# Altium PCB PCB-watch-V2.4.PcbDoc
Units mil, origin at the board's own origin, x right, y up, seen from the top; angles counter-clockwise.
Board outline 1043.31 x 1259.84 mil, 4 copper layers (Top Layer, GND, POWER, Bottom Layer), stack 23.756 mil thick; 96 components, 97 nets, 405 pads, 178 vias.
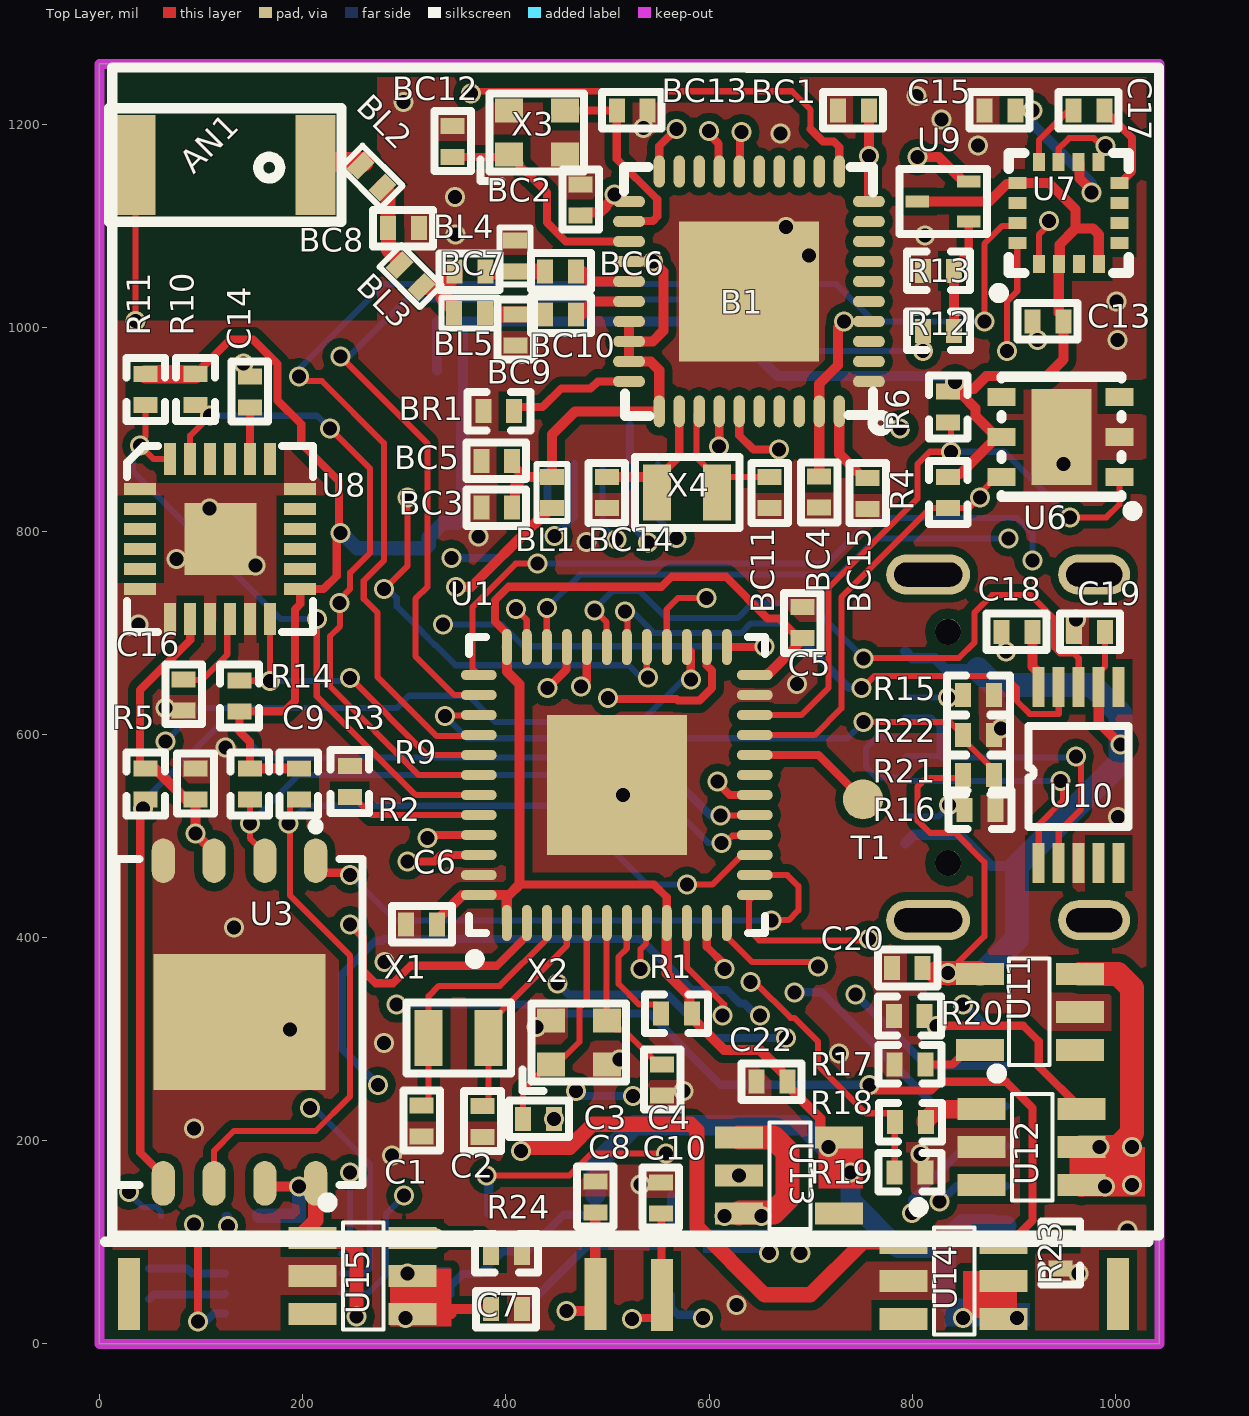
[diagram p0: Top Layer view]
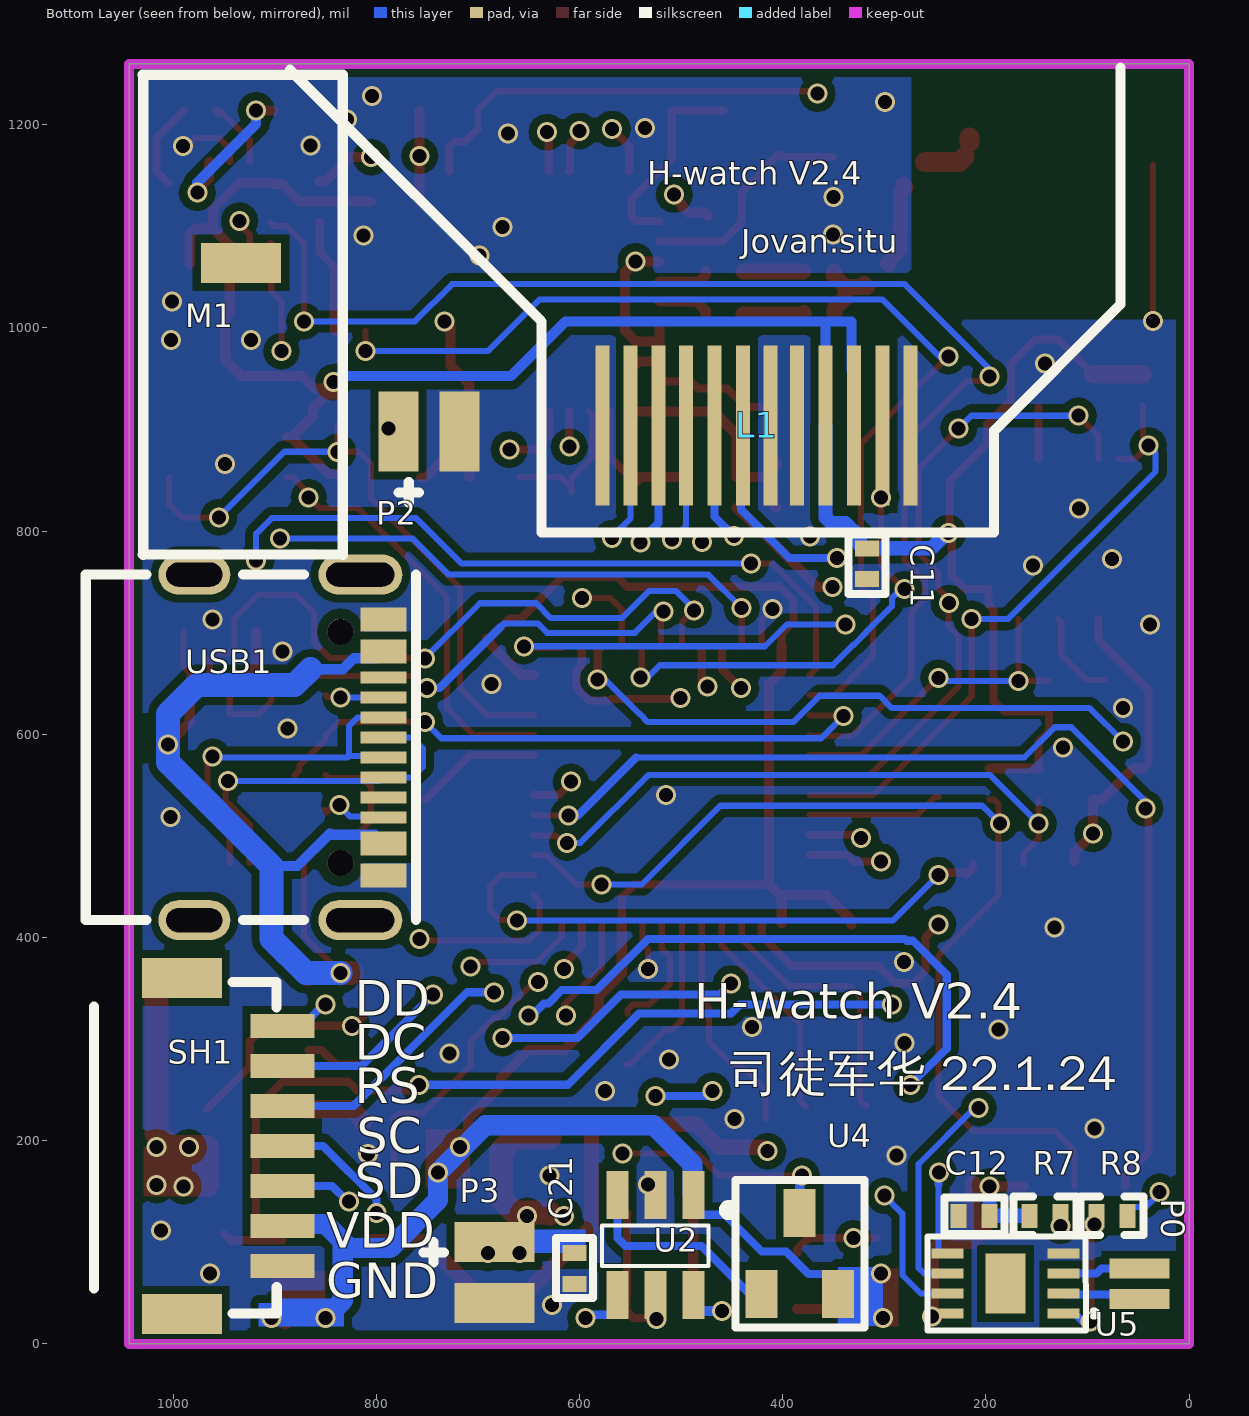
[diagram p1: Bottom Layer view, seen from below]
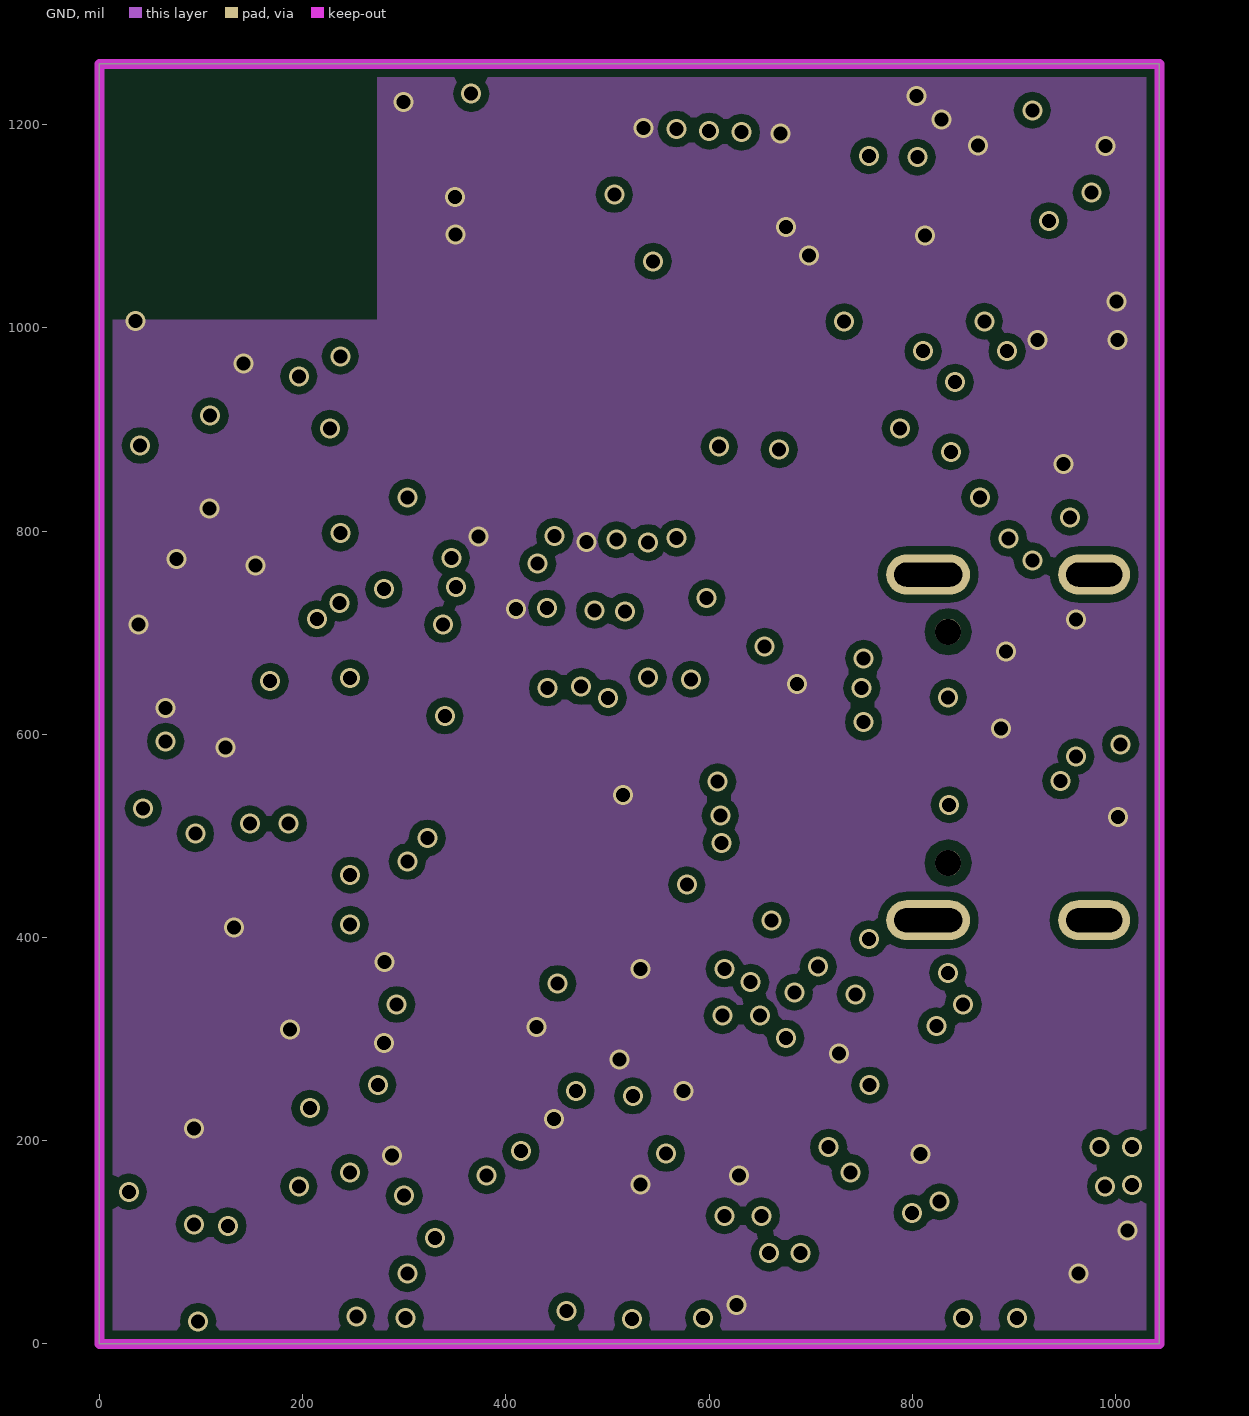
[diagram p2: GND]
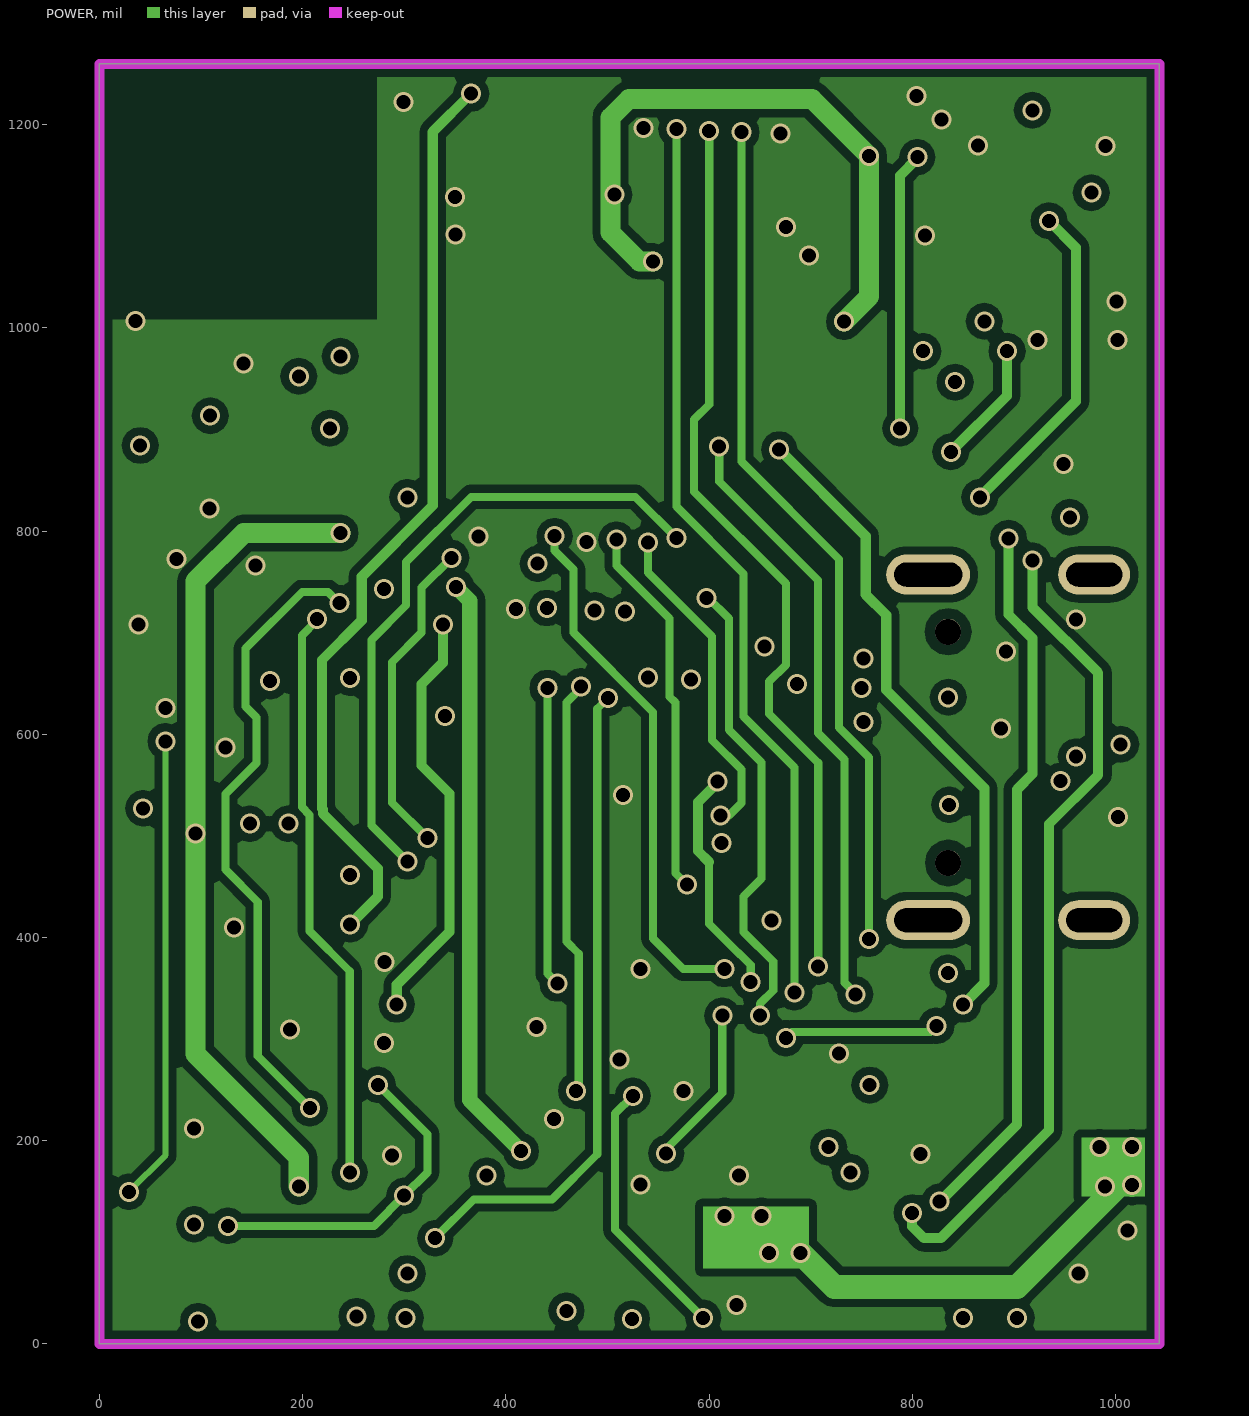
[diagram p3: POWER]
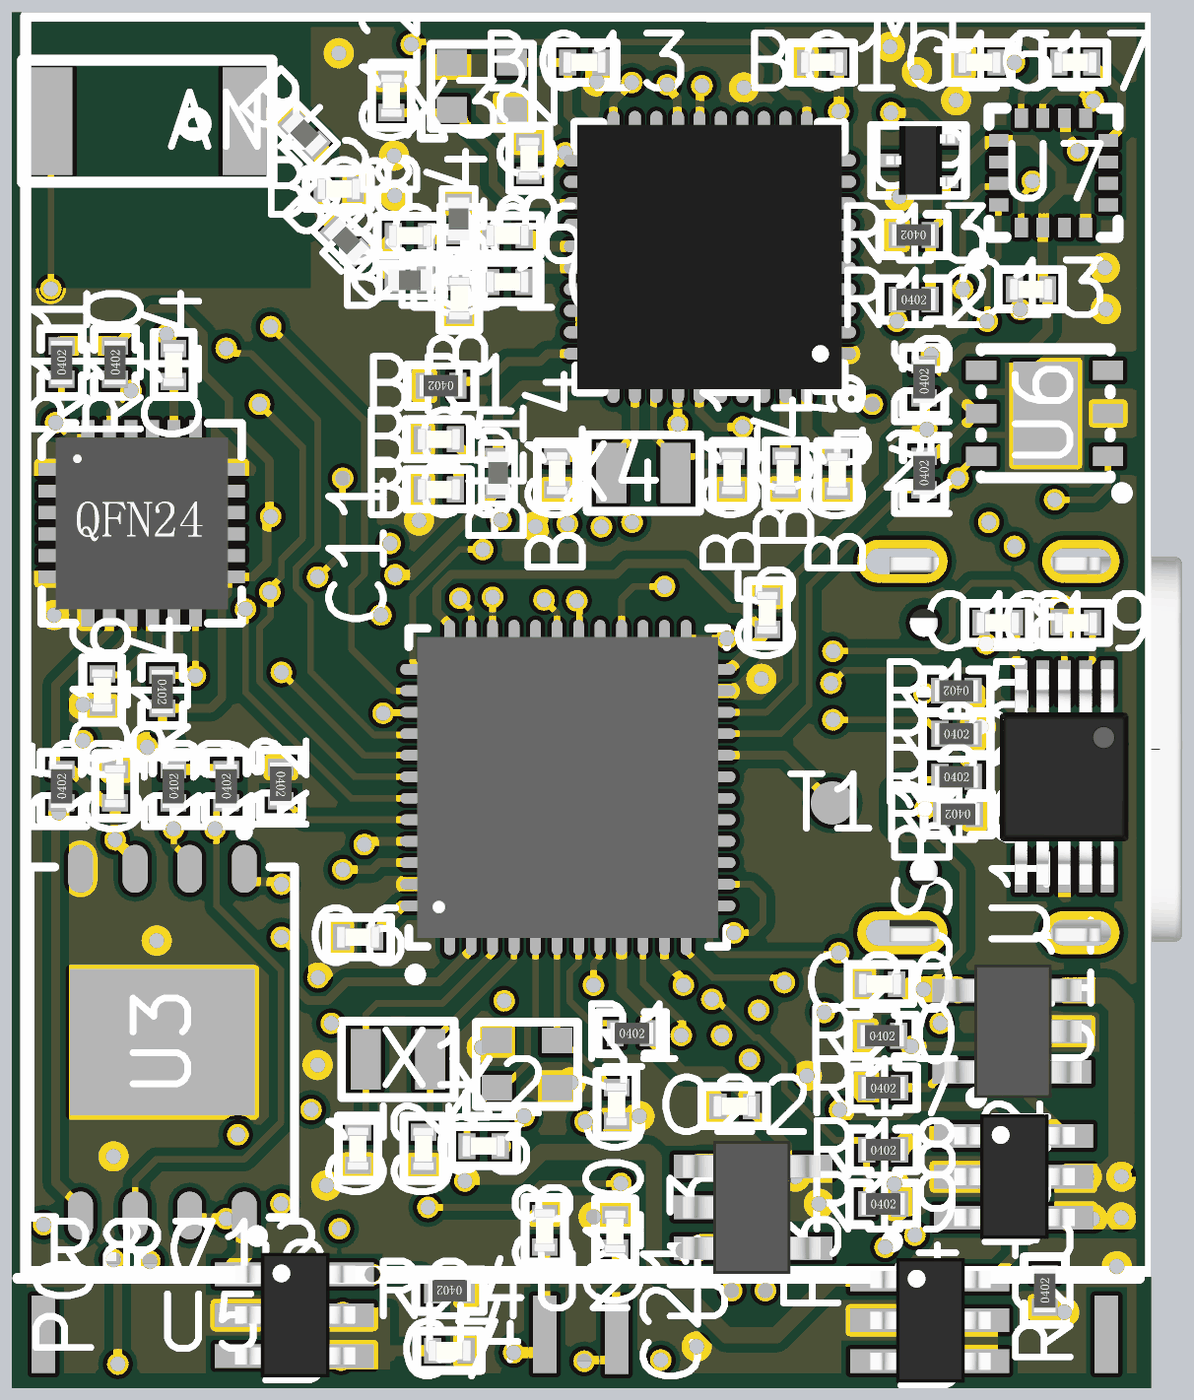
[diagram p4: 3D render of the assembled board from above, using the file's embedded part models]
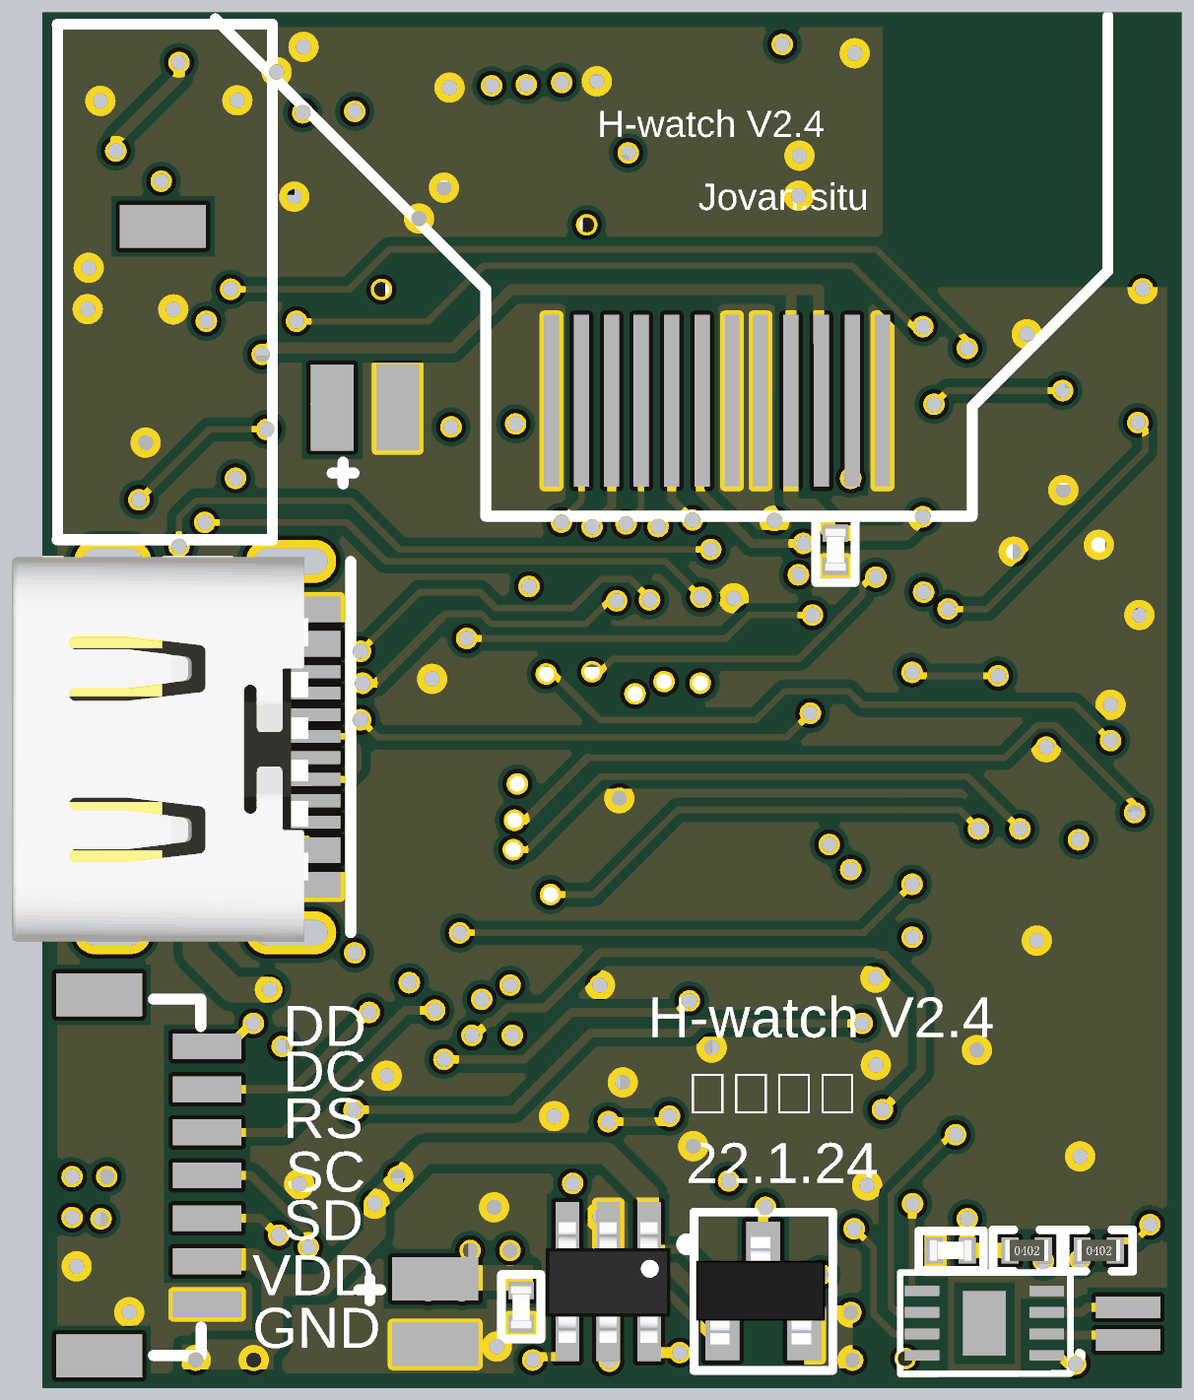
[diagram p5: 3D render of the assembled board from below, using the file's embedded part models]

## Layer stack, top to bottom
Top Solder: solder mask 0.4, Solder Resist, Dk 3.5
Top Layer: signal copper 1.4
Dielectric 2: prepreg 2.8, PP-006, Dk 4.1
GND: signal copper 1.378
Dielectric 1: dielectric 12.6, FR-4, Dk 4.8
POWER: signal copper 1.378
Dielectric 3: prepreg 2.8, PP-006, Dk 4.1
Bottom Layer: signal copper 1.4
Bottom Solder: solder mask 0.4, Solder Resist, Dk 3.5

## Board outline
0,0 0,1259.84 1043.31,1259.84 1043.31,0

## Design rules (kind name [scope] priority, off if disabled: settings)
Clearance [All] p1: gap=8 except(4: Arc-Arc Arc-Track Arc-SMDPad Arc-THPad Arc-Via Track-Track Track-SMDPad Track-THPad Track-Via SMDPad-SMDPad SMDPad-THPad SMDPad-Via THPad-THPad THPad-Via Via-Via; 10: Arc-Text Track-Text SMDPad-Text THPad-Text Via-Text Fill-Text Poly-Text Region-Text Text-Text)
DiffPairsRouting [All] p1: maxlimit=10 minlimit=5.91 mostfreqgap=10 toplayer_minwidth=15 toplayer_maxwidth=15 toplayer_prefwidth=15 midlayer1_minwidth=15 midlayer1_maxwidth=15 midlayer1_prefwidth=15 midlayer2_minwidth=15 midlayer2_maxwidth=15 midlayer2_prefwidth=15 bottomlayer_minwidth=15 bottomlayer_maxwidth=15 bottomlayer_prefwidth=15 maxuncoupledlength=500
HoleToHoleClearance [All] p1: gap=5.91 allowstackedmicrovias=TRUE
MinimumSolderMaskSliver [All] p1: minsoldermaskwidth=0.39
PlaneConnect [All] p1: planeconnectstyle=Relief reliefexpansion=20 reliefentries=4 reliefconductorwidth=19.68 reliefairgap=10
PolygonConnect [All] p1: connectstyle=Direct reliefconductorwidth=15.75 reliefentries=4 polygonreliefangle="90 Angle" airgapwidth=5.91
RoutingVias [All] p1: holewidth=118.11 width=118.11 viastyle="Through Hole" minholewidth=9.84 minwidth=13.78 maxholewidth=118.11 maxwidth=118.11
SilkToSilkClearance [All] p1: silktosilkclearance=0
SilkToSolderMaskClearance [IsPad] p1: minsilkscreentomaskgap=0 clearancetoexposedcopper=TRUE
SolderMaskExpansion [All] p1: expansion=4
Width [All] p1: maxlimit=39.37 minlimit=3 preferedwidth=6
24 further rules are at their usual default settings.

## Classes and differential pairs
component class 01-MCU-V2.4: C1 C2 C3 C4 C5 C6 R1 R2 SH1 T1 U1 X1 X2
component class 02-bluetooth-V2.4: AN1 B1 BC1 BC2 BC3 BC4 BC5 BC6 BC7 BC8 BC9 BC10 BC11 BC12 BC13 BC14 BC15 BL1 BL2 BL3 BL4 BL5 BR1 X3 X4
component class 03-PeripheralPart-V2.4: 1 C7 C8 C9 C10 C11 C12 C13 C14 C15 C16 C17 L1 M1 P0 P2 R3 R4 R5 R6 R7 R8 R9 R10 R11 R12 R13 R14 U2 U3 U4 U5 U6 U7 U8 U9
component class 04-POWERV2.4: C18 C19 C20 C21 C22 P3 R15 R16 R17 R18 R19 R20 R21 R22 R23 R24 U10 U11 U12 U13 U14 USB1

## Components (designator, comment, footprint, x,y, rotation, side; value= is the part's Value field where it differs from the comment)
AN1 "AN9520-245" AN-5120 212.79,1160.24 r180 top
B1 "CC2541" QFN40-CC254X 639.28,1035.84 r90 top
BC1 "100nF" CC1005-0402 742.09,1214 r180 top
BC2 "100nF" CC1005-0402 473.67,1125.87 r90 top
BC3 "220nF" CC1005-0402 391,823 r180 top
BC4 "100nF" CC1005-0402 708.43,838.24 r270 top
BC5 "10uF" CC1005-0402 391,869 r180 top
BC6 "18pF" CC1005-0402 453.87,1055.63 r0 top
BC7 "1pF" CC1005-0402 364.68,1055.2 r180 top
BC8 "1pF" CC1005-0402 299.34,1098.11 r180 top
BC9 "1pF" CC1005-0402 409.69,997.84 r90 top
BC10 "18pF" CC1005-0402 453.76,1013 r0 top
BC11 "15pF" CC1005-0402 659.56,838 r270 top
BC12 "27pF" CC1005-0402 347.56,1183.57 r90 top
BC13 "27pF" CC1005-0402 524.39,1214 r180 top
BC14 "15pF" CC1005-0402 499.32,837.83 r270 top
BC15 "100pF" CC1005-0402 756,836.96 r90 top
BL1 "2nH" Inductor-0402 445.24,838 r270 top
BL2 "1nH" Inductor-0402 267.87,1148.81 r315 top
BL3 "1nH" Inductor-0402 306.15,1050.96 r315 top
BL4 "2nH" Inductor-0402 409.11,1070.64 r270 top
BL5 "2nH" Inductor-0402 364.41,1014.72 r0 top
BR1 "56KR" CR1005-0402 393,918 r180 top
C1 "15pF" CC1005-0402 317,219.24 r90 top
C2 "15pF" CC1005-0402 377,219 r90 top
C3 "27pF" CC1005-0402 432,221.52 r0 top
C4 "27pF" CC1005-0402 553.81,259.88 r90 top
C5 "100nF" CC1005-0402 691.89,710.02 r270 top
C6 "100nF" CC1005-0402 317.01,412.91 r0 top
C7 "100NF" CC1005-0402 400.81,34.2 r180 top
C8 "1pF" CC1005-0402 488,144.46 r90 top
C9 "100nF" CC1005-0402 94.47,551.13 r90 top
C10 "1pF" CC1005-0402 552.54,143.34 r90 top
C11 "100nF" CC1005-0402 317.01,767.81 r270 bottom
C12 "100nF" CC1005-0402 211.51,126 r180 bottom
C13 "100nF" CC1005-0402 933.45,1006.31 r180 top
C14 "2.2uF" CC1005-0402 148,937 r90 top
C15 "4.7uF" CC1005-0402 886.2,1214 r180 top
C16 "100NF" CC1005-0402 82.79,638.83 r90 top
C17 "0.22uF" CC1005-0402 974,1214 r180 top
C18 "100nF" CC1005-0402 902.98,700.86 r180 top
C19 "100nF" CC1005-0402 974.51,700.86 r0 top
C20 "10uF" CC1005-0402 795.03,369.91 r0 top
C21 "10uF" CC1005-0402 604.89,74 r90 bottom
C22 "10uF" CC1005-0402 662,258 r180 top
L1 "TFT LED" LCD-1.3-(2) 274,904.07 r180 top locked
M1 "motor" motor 833,1249 r0 bottom
P0 "power" POWER2 49,74 r270 bottom
P2 "power" POWER-3.7V 793,848 r180 bottom
P3 "power" POWER-3.7V 733.57,115 r270 bottom
R1 "10K" CR1005-0402 567.78,325 r0 top
R2 "10K" CR1005-0402 246.34,553.31 r270 top
R3 "47K" CR1005-0402 148,551.13 r90 top
R4 "10K" CR1005-0402 835.3,838 r90 top
R5 "47K" CR1005-0402 45.39,551.13 r90 top
R6 "10K" CR1005-0402 835.3,922 r90 top
R7 "4.7K" CR1005-0402 141.72,126 r180 bottom
R8 "1K" CR1005-0402 75.78,126 r180 bottom
R9 "47K" CR1005-0402 196.27,551.13 r90 top
R10 "10K" CR1005-0402 94.47,939.22 r90 top
R11 "10K" CR1005-0402 45.39,939.22 r90 top
R12 "1K" CR1005-0402 826,997 r0 top
R13 "10K" CR1005-0402 825.86,1056 r180 top
R14 "10K" CR1005-0402 137.79,637.83 r270 top
R15 "1.5K" CR1005-0402 865,638.58 r180 top
R16 "1.5K" CR1005-0402 866.53,525.6 r180 top
R17 "2KR" CR1005-0402 797.97,275 r0 top
R18 "10K" CR1005-0402 798.03,218.13 r0 top
R19 "10K" CR1005-0402 797.97,168.73 r0 top
R20 "10K" CR1005-0402 797.03,322.72 r0 top
R21 "10K" CR1005-0402 865.14,559.84 r0 top
R22 "10K" CR1005-0402 865.14,599.21 r0 top
R23 "10K" CR1005-0402 946,89.24 r90 top
R24 "10K" CR1005-0402 400.81,89.24 r180 top
SH1 "SH1.0-7P" SH1.0-7P 925.65,234.18 r270 bottom
T1 "测试点" 测试点 751.44,535.86 r0 top
U1 "STM32L431CCU6" STM32-UFQFPN48_N 509.16,550 r90 top locked
U2 "BS812A-1" SOT23-6 522.81,96.65 r0 bottom
U3 "W25Q64JVEIQ" WSON-8_L8.0-W6.10-P1.27-TL-EP 137.79,316.73 r270 top
U4 "SI2305" SOT-23 420.57,49.15 r180 bottom
U5 "ST25DV04k" UFDFPN8 180.59,59.4 r0 bottom
U6 "SI7020" DFN-6 945.84,892.64 r90 top
U7 "HMC5883L" LPCC-16_L3.0-W3.0-P0.50-BL 954,1113 r0 top
U8 "MPU6050" "QFN24 - duplicate" 118.82,792.01 r0 top
U9 "MMBT3904TT1G" SOT-416 830.3,1124.43 r0 top
U10 "CH340E" MSOP-10 924.47,473.3 r90 top
U11 "TP4054" SOT23-5 964.95,364.33 r270 top
U12 "TPS22860" SOT23-6 918.22,196 r270 top
U13 "TPS709" SOT23-5 629.69,127.91 r90 top
U14 "TPS22860" SOT23-6 841.23,64.39 r270 top
U15 "TPS22860" SOT23-6 259.44,69.2 r270 top
USB1 "Tpye-c 16P" "TYPE-C 16P" 835.3,473.3 r270 bottom locked
X1 "32.768Khz" XTAL-2012 383.06,301 r180 top
X2 "32Mhz" XTAL-2016 444.2,275 r0 top
X3 "32Mhz" XTAL-2016 402.88,1170.69 r0 top
X4 "32.768Khz" XTAL-2012 548.94,838 r0 top

## Footprints (in the part's own frame and the unit in brackets; to place one, negate y for a bottom-side part, rotate by r counter-clockwise, add the part's x,y. Pads: shape width x height; smd on the part's side, far side on the other; paste and mask are expansions set on the pad)
AN-5120 [mm]
  rect 1x2.5 smd: 1(0,0) 2(4.5,0)
  silkscreen extent -0.65,-1.42 5.16,1.42, body extent -0.32,-1.03 4.77,1.03, height 1.2
CC1005-0402 [mm]
  rect 0.4x0.6 smd: 1(-0.387,0) 2(0.387,0)
  silkscreen extent -0.74,-0.46 0.76,0.46, body extent -0.5,-0.25 0.5,0.25, height 0.3
CR1005-0402 [mm]
  rect 0.4x0.6 smd: 1(-0.387,0) 2(0.387,0)
  silkscreen extent -0.79,-0.48 0.79,0.48, body extent -0.5,-0.25 0.5,0.25, height 0.35
DFN-6 [mm]
  rect 0.45x0.701 smd: 1(-1.001,-1.476) 2(0,-1.476) 3(1.001,-1.476) 4(1.001,1.476) 5(0,1.476) 6(-1.001,1.476)
  rect 2.4x1.5 smd: 7(0,-0.025)
  silkscreen extent -1.95,-1.9 1.5,1.47, body extent -1.52,-1.55 1.5,1.47, height 1
Inductor-0402 [mm]
  rect 0.4x0.6 smd: 1(-0.387,0) 2(0.387,0)
  silkscreen extent -0.71,-0.39 0.71,0.39, body extent -0.5,-0.25 0.5,0.25, height 0.25
LCD-1.3-(2) [mm]
  rect 0.35x4 smd far side: 1(0,0) 2(-0.7,0) 3(-1.419,0) 4(-2.128,0) 5(-2.838,0) 6(-3.5,0) 7(-4.193,0) 8(-4.902,0) 9(-5.612,0) 10(-6.3,0) 11(-7,0) 12(-7.7,0)
  silkscreen extent -19.53,-8.94 6.64,20.25, body extent -19.52,-8.94 6.67,20.21, height 2.32
LPCC-16_L3.0-W3.0-P0.50-BL [mm]
  rect 0.3x0.45 smd: 1(-0.749,-1.275) 2(-0.249,-1.275) 3(0.251,-1.275) 4(0.751,-1.275) 9(0.75,1.275) 10(0.25,1.275) 11(-0.25,1.275) 12(-0.749,1.275)
  rect 0.45x0.3 smd: 5(1.275,-0.748) 6(1.275,-0.248) 7(1.275,0.252) 8(1.275,0.752) 13(-1.275,0.752) 14(-1.275,0.252) 15(-1.275,-0.248) 16(-1.275,-0.748)
  silkscreen extent -1.87,-2.12 1.5,1.5, body extent -1.42,-1.48 1.42,1.42, height 0.9
motor [mm]
  rect 2x1 smd: 3(2.54,4.699)
  silkscreen extent 0,0 5,12, body extent 0,0.03 4.95,11.96, height 4.9
MSOP-10 [mm]
  rect 1x0.3 smd: 1(0,0) 2(0,-0.5) 3(0,-1) 4(0,-1.5) 5(0,-2) 6(4.403,-2) 7(4.403,-1.5) 8(4.403,-1) 9(4.403,-0.5) 10(4.403,0)
  silkscreen extent 0.9,-2.25 3.42,0.25, body extent -0.32,-2.5 4.71,0.5, height 1.05
POWER2 [mm]
  rect 0.5x1.5 smd: 1(0,0) 2(0.762,0)
POWER-3.7V [mm]
  rect 1x2 smd: 1(0.381,1.27) 2(1.905,1.27)
  silkscreen extent 0.38,-0.51 0.89,0
"QFN24 - duplicate" [mm]
  rect 0.8x0.3 smd: 1(-2,1.25) 2(-2,0.75) 3(-2,0.25) 4(-2,-0.25) 5(-2,-0.75) 6(-2,-1.25) 13(2,-1.25) 14(2,-0.75) 15(2,-0.25) 16(2,0.25) 17(2,0.75) 18(2,1.25)
  rect 1.8x1.8 smd: 1(0.005,0)
  rect 0.3x0.8 smd: 7(-1.25,-2) 8(-0.75,-2) 9(-0.25,-2) 10(0.25,-2) 11(0.75,-2) 12(1.25,-2) 19(1.25,2) 20(0.75,2) 21(0.25,2) 22(-0.25,2) 23(-0.75,2) 24(-1.25,2)
  silkscreen extent -2.32,-2.32 2.32,2.32, body extent -2,-2 2.01,2, height 0.9
QFN40-CC254X [mm]
  oval 0.28x0.8 smd: 1(-2.25,-2.998) 2(-1.75,-2.998) 3(-1.25,-2.998) 4(-0.75,-2.998) 5(-0.25,-2.998) 6(0.25,-2.998) 7(0.75,-2.998) 8(1.25,-2.998) 9(1.75,-2.998) 10(2.25,-2.998) 21(2.246,2.996) 22(1.75,2.998) 23(1.25,2.998) 24(0.75,2.998) 25(0.25,2.998) 26(-0.25,2.998) 27(-0.75,2.998) 28(-1.25,2.998) 29(-1.75,2.998) 30(-2.25,2.998)
  oval 0.8x0.28 smd: 11(2.998,-2.256) 12(2.998,-1.756) 13(2.998,-1.256) 14(2.998,-0.756) 15(2.998,-0.256) 16(2.998,0.244) 17(2.998,0.744) 18(2.998,1.244) 19(2.998,1.744) 20(2.998,2.244) 31(-2.998,2.244) 32(-2.998,1.744) 33(-2.998,1.244) 34(-2.998,0.744) 35(-2.998,0.244) 36(-2.998,-0.256) 37(-2.998,-0.756) 38(-2.998,-1.256) 39(-2.998,-1.756) 40(-2.998,-2.256)
  rect 3.5x3.5 smd: 41(0,0)
  silkscreen extent -3.49,-3.49 3.11,3.12, body extent -3.08,-3.07 3.07,3.08, height 1.08
SH1.0-7P [mm]
  rect 0.6x1.6 smd: 1(-2,0.844) 2(-1,0.844) 3(0,0.844) 4(1,0.844) 5(2,0.844) 6(3,0.844) 7(4,0.844)
  rect 1x2 smd: 8(-3.2,-1.67) 9(5.2,-1.67)
  silkscreen extent -3.1,-3.87 5.19,0.7, body extent -3.15,-3.89 5.18,0.69, height 3
SOT23-5 [mm] "适用于MIC5205"
  rect 0.55x1.2 smd: 1(1.905,0) 2(0.955,0) 3(0.005,0) 4(0.005,-2.5) 5(1.905,-2.5)
  silkscreen extent -0.38,-1.78 2.29,-0.76, body extent -0.6,-2.82 2.5,0.38, height 1.45
SOT23-6 [mm]
  rect 0.55x1.2 smd: 1(-0.889,-1.27) 2(0.061,-1.27) 3(1.011,-1.27) 4(1.011,1.23) 5(0.061,1.23) 6(-0.889,1.23)
  silkscreen extent -1.9,-1.02 1.4,0.51, body extent -1.39,-1.4 1.51,1.4, height 1.45
SOT-23 [mm]
  rect 0.8x1.2 smd: 1(0,0) 2(1.905,0) 3(0.95,2.02)
  silkscreen extent -0.66,-0.84 2.57,2.84, body extent -0.61,-0.23 2.39,2.27, height 1.05
SOT-416 [mm]
  rect 0.585x0.301 smd: 1(0.642,-0.5) 2(0.642,0.5) 3(-0.642,0)
  silkscreen extent -1.09,-0.81 1.09,0.81, body extent -0.75,-0.8 0.85,0.8, height 0.78
STM32-UFQFPN48_N [mm] "QFN, 48-Leads, Body 7.1x7.1mm, Pitch 0.5mm, Thermal Pad 5.6x5.6mm, IPC Medium Density"
  oval 0.9x0.25 smd: 1(-3.45,2.75) 2(-3.45,2.25) 3(-3.45,1.75) 4(-3.45,1.25) 5(-3.45,0.75) 6(-3.45,0.25) 7(-3.45,-0.25) 8(-3.45,-0.75) 9(-3.45,-1.25) 10(-3.45,-1.75) 11(-3.45,-2.25) 12(-3.45,-2.75) 25(3.45,-2.75) 26(3.45,-2.25) 27(3.45,-1.75) 28(3.45,-1.25) 29(3.45,-0.75) 30(3.45,-0.25) 31(3.45,0.25) 32(3.45,0.75) 33(3.45,1.25) 34(3.45,1.75) 35(3.45,2.25) 36(3.45,2.75)
  oval 0.25x0.9 smd: 13(-2.75,-3.45) 14(-2.25,-3.45) 15(-1.75,-3.45) 16(-1.25,-3.45) 17(-0.75,-3.45) 18(-0.25,-3.45) 19(0.25,-3.45) 20(0.75,-3.45) 21(1.25,-3.45) 22(1.75,-3.45) 23(2.25,-3.45) 24(2.75,-3.45) 37(2.75,3.45) 38(2.25,3.45) 39(1.75,3.45) 40(1.25,3.45) 41(0.75,3.45) 42(0.25,3.45) 43(-0.25,3.45) 44(-0.75,3.45) 45(-1.25,3.45) 46(-1.75,3.45) 47(-2.25,3.45) 48(-2.75,3.45)
  rect 3.5x3.5 smd: 49(0,0)
  silkscreen extent -4.47,-3.7 3.7,3.7, body extent -3.5,-3.5 3.5,3.5, height 0.55
"TYPE-C 16P" [mm]
  oval 1x2.099 hole 0.6 slot 1.7 at 90 deg: 1(-7.21,0.5) 2(1.43,0.5)
  oval 1x1.799 hole 0.6 slot 1.4 at 90 deg: 3(-7.21,-3.65) 4(1.43,-3.65)
  rect 0.6x1.15 smd: A1B12(-6.09,1.075) A4B9(-5.29,1.075) B1A12(0.31,1.075) B4A9(-0.49,1.075)
  rect 0.3x1.15 smd: A5(-4.14,1.075) A6(-3.14,1.075) A7(-2.64,1.075) A8(-1.64,1.075) B5(-1.14,1.075) B6(-2.14,1.075) B7(-3.64,1.075) B8(-4.64,1.075)
  round 0.65 hole 0.65 unplated: ""(-5.78,0) ""(0,0)
  silkscreen extent -7.21,-6.37 1.43,1.89, body extent -7.31,-6 1.63,0.9, height 3.18
UFDFPN8 [mm]
  rect 0.805x0.249 smd paste+0 mask+0: 1(-1.452,0.751) 2(-1.452,0.25) 3(-1.452,-0.25) 4(-1.452,-0.751) 5(1.452,-0.751) 6(1.452,-0.25) 7(1.452,0.25) 8(1.452,0.751)
  rect 1x1.5 smd paste+0 mask+0: 9(0,0)
  silkscreen extent -2.28,-1.18 1.96,1.18, body extent -1.52,-1.14 1.52,1.14, height 1
WSON-8_L8.0-W6.10-P1.27-TL-EP [mm]
  oval 1.115x0.581 smd: 1(-4.033,1.905) 2(-4.033,0.635) 3(-4.033,-0.635) 4(-4.033,-1.905) 5(4.033,-1.905) 6(4.033,-0.635) 7(4.033,0.635) 8(4.033,1.905)
  rect 3.4x4.3 smd: 4(0,0)
  silkscreen extent -4.99,-3.08 4.08,3.08, body extent -4.06,-3.1 4.06,3.1, height 1.2
XTAL-2012 [mm]
  rect 0.7x1.4 smd: 1(0,0) 2(1.5,0)
  silkscreen extent -0.56,-0.89 2.06,0.89, body extent -0.21,-0.69 1.76,0.69, height 0.55
XTAL-2016 [mm] "缺的角在右边"
  rect 0.7x0.6 smd: 1(0,0) 2(1.4,0) 3(1.4,1.1) 4(0,1.1)
  silkscreen extent -0.71,-0.66 1.88,1.52, body extent -0.27,-0.24 1.69,1.4, height 0.55
测试点 [mm]
  round 1 smd: 1(0,0)

## Part data
AN1: "2.4G全向天线 蓝牙天线 陶瓷贴片 WIFI内置"
B1: "低功耗蓝牙芯片"
BC1 BC2 BC3 BC4 BC5 BC6 BC7 BC8 BC9 BC10 BC11 BC12 BC13 BC14 BC15 C1 C2 C3 C4 C5 C6 C7 C8 C9 C10 C11 C12 C13 C14 C15 C16 C17 C18 C19 C20 C21 C22: library part "Chip capacitor", "贴片电容"
BL1 BL2 BL3 BL4 BL5: library part Inductor-0402, "0402封装的电感"
BR1 R1 R2 R3 R4 R5 R6 R7 R8 R9 R10 R11 R12 R13 R14 R15 R16 R17 R18 R19 R20 R21 R22 R23 R24: library part "Chip resistor", "贴片电阻"
L1: library part LCD-IPSscreen-1.3, "1.3寸显示屏幕"
M1: "震动马达"
SH1: "间距为1mm的端子"
U1: "stm32低功耗单片机 主频80MHz"
U2: "触摸按键 两路 SOP23-6封装极简电路"
U3: library part W25Q256JVEIQ, "FLASH"
U4: "PMOS场效应MOS管 SOT-23"
U5: "NFC芯片4K存储空间"
U6: "温湿度传感器芯片"
U7: "三轴罗盘"
U8: "陀螺仪"
U9: "NPN 电流 - 集电极（Ic）（最大值）：200mA 电压 - 集射极击穿（最大值）：40V SOT-23-3"
U10: "usd转串口芯片 MSOP10封装"
U11: "迷你充电IC SOT-23-5"
U12 U14 U15: "超低泄漏电流负载开关  超低泄漏电流负载开关 它可支持最大 200mA 的持续电 流。 此开关可由一个打开/关闭"
U13: "3.3V降压IC SOT23-5封装 最大输出150ma电流"
USB1: "16P 封装的TYPE -c接口 4固定插脚 双向"
X1 X4: library part "XTAL 2012", "2012封装的时钟晶振"
X2 X3: library part "XTAL 2016", "2016封装的晶振"

## Free pads (board coordinates)
  rect 21.65x70.87 smd: 2(28.95,49.15) 2(488,49.15) 2(553.81,48.22) 2(1002.53,49.15)

## Via types
v1: diameter 19.68, hole 13.78, Top Layer to Bottom Layer, 178 vias

## Nets (pads, with @x,y where several pads share a name; then routed paths per layer and width w, separated by ;. In a path a pad name is that pad's centre, name@x,y a point inside that pad or via, vN(x,y) a via of type N, cw(c..) or ccw(c..) an arc to the next point about the centre after c; other vN are vias at no path point)
3.3V: C9.1 C11.1 C12.2 C13.1 L1.3 L1.4 R3.2 R4.2 R5.2 R6.2 R7.1 R9.2 R10.2 R11.2 R14.2 U3.3 U3.7 U3.8 U5.8 U6.5 U7.2 U7.4 U7.13 U8.8 U8.13 U9.3 U15.1 | length 3673.1
  Top Layer w8: R5.2 40,571.76 40,643.54 89.29,692.83 U8.8 ; R10.2 128.66,988.65 151.13,988.65 175.39,964.39 175.39,928.61 198.61,905.39 198.61,886.11 235.76,848.96 235.76,799.24 v1(237,798) 233.53,794.53 233.53,755.77 220.55,742.79 U8.13 197.56,728.09 192.29,722.82 192.29,632.77 182.11,622.59 R14.2 137.79,602.76 148,592.54 R3.2
  Top Layer w10: R5.2 54.34,566.37 84.81,535.9 C9.1 v1(94.47,502.12) 112.79,483.8 U3.3 ; R3.2 R9.2 ; U3.7@162.79,154.98 U3.8@212.79,154.98 ; U9.3 876.01,1124.43 893.28,1141.7 902.9,1141.7 U7.13 934.55,1142.61 960.74,1116.42 960.74,1098.11 960.97,1097.88 ; R4.2 838.18,856.11 847.07,856.11 863,872.05 883.2,892.24 U6.5@882.8,892.64 ; v1(842.11,946.61) R6.2@842.11,940.11 ; U6.5 U6.5@882.8,892.64 ; U7.4 983.59,1092.02 977.73,1097.88 960.97,1097.88 ; R6.2@842.11,940.11 839.24,937.24 R6.2 838.18,934.36 848.59,934.36 862.11,920.85 862.11,913.33 U6.5@882.8,892.64 ; R6.2@842.11,940.11 860.43,940.11 872.79,952.47 932.49,952.47 948.69,968.67 C13.1 948.69,1010.25 944.22,1014.72 U7.2 945.12,1063.72 945.12,1082.02 960.97,1097.88
  Top Layer w14: U15.1 213.27,100.37 244.43,100.37 253,91.8 v1(253,27)
  Top Layer w15: U15.1@200.27,109 212.79,121.51 212.79,154.98 U3.8
  Top Layer w18: R11.2 R10.2
  POWER w20: v1(196.27,154.98) 196.27,183.48 94.47,285.28 v1(94.47,502.12) 94.47,750.47 142,798 v1(237,798)
  Bottom Layer w10: L1.3@332.24,957.97 332.24,1006.12 357.8,1006.12 ; L1.4 357.8,1006.12 ; v1(842.11,946.61) 836.25,952.47 667.53,952.47 613.88,1006.12 357.8,1006.12
  Bottom Layer w14: R7.1 C12.2 v1(196.27,154.98) ; v1(237,798) 238.54,798 253.49,783.04 C11.1 320.95,783.04 324.11,786.21 324.11,793.9 338.1,807.89 352.22,807.89 357.8,813.47 L1.4
5V: C19.2 C20.2 R21.1 U10.7 U11.4 USB1.A4B9 USB1.B4A9 | length 1165.4
  Top Layer w6: v1(834.99,365.12) 870.96,401.09 870.96,474.12 842.25,502.82 817.26,502.82 805.25,514.84 805.25,548.29 813.98,557.02 847.08,557.02 R21.1 ; U10.7 983.52,660.42 989.75,666.65 C19.2
  Top Layer w10: U10.7 983.52,611.47 v1(1005,590)
  Top Layer w23.62: 824.45,365.12 v1(834.99,365.12) ; v1@834.99,364.54 v1(834.99,365.12) ; U11.4 865.54,365.12 v1(834.99,365.12)
  Bottom Layer w10: USB1.B4A9 801.48,501.09 846.82,501.09 ; USB1.A4B9 799.79,674.76 822.1,674.76 832.85,664 864.78,664 ; 845.79,502.12 846.82,501.09 ; 903,470.41 877.5,470.41 846.82,501.09
  Bottom Layer w23.62: v1@835.28,364.83 869.14,364.83 903,398.68 903,470.41 1005,572.41 v1(1005,590) 1005,620.14 976.65,648.48 880.3,648.48 864.78,664
ADC1_IN15: R18.1 R19.1 U1.18 | length 535.6
  Top Layer w6: v1(641,356) 645.13,356 680.24,320.89 683.84,320.89 707.39,297.34 707.39,273.82 754.27,226.94 777.92,226.94 782.8,222.07 R18.1 ; R19.1@782.76,168.77 R18.1
  Top Layer w8: v1@610,554 610,550.54 620.39,540.16 U1.18
  POWER w8: 600.05,474.11 600.05,413.49 629.6,383.94 630.06,383.94 641,373 v1(641,356)
  POWER w10: 600.05,474.11 589.11,485.05 589.11,533.11 v1@610,554
  other v1: 608.39,553.26
BLE_ON: R23.2 U1.25 U14.6 | length 1646.4
  Top Layer w8: U1.25 654.01,685.83 v1(654.75,686.56) ; v1@763.08,249.33 818.53,249.33 827.2,258 892.44,258 918.22,232.22 918.22,121.51 U14.6@900.9,104.2 ; U14.6@892.19,101.93 943.46,101.93 R23.2 ; R23.2@942.62,100.88 R23.2@949.59,107.84
  POWER w10: v1(292.55,334) 292.55,353.44 344.57,405.46 344.57,541.61 317.01,569.17 317.01,649.29 338,670.29 v1(338,708)
  Bottom Layer w6: v1(338,708) 395.91,708 417.35,686.56 v1(654.75,686.56)
  Bottom Layer w8: v1(292.55,334) 441.95,334 450.95,325 541.3,325 611.3,255 v1@758,255
  other v1: 758,254.71
BOOT0: R2.2 U1.44 | length 134.3
  Top Layer w6: R2.2 250.27,538.07 267.87,520.47 U1.44
DEBUG_CLOCK: B1.34 SH1.2 | length 808.3
  Top Layer w8: v1(610,883) B1.34
  POWER w8: v1(610,883) 610,848.89 707.34,751.55 707.34,601.33 733.38,575.29 733.38,355.46 744,344.84 v1(744,344)
  Bottom Layer w8: v1@743,345 v1(744,344) 814.45,273.55 SH1.2
DEBUG_DATA: B1.35 SH1.1 | length 758.3
  Top Layer w8: B1.35 629.69,894.11 643.59,880.21 v1(669.06,880.21)
  POWER w10: v1(669.06,880.21) 754.27,795.01 754.27,737.38 774.37,717.28 774.37,643.51 870.96,546.92 870.96,354.85 v1(850.11,334)
  Bottom Layer w8: v1(850.11,334) 851.66,334 872.75,312.92 SH1.1
DM_USB-: U10.2 USB1.A7 USB1.B7 | length 360.9
  Top Layer w6: U10.2 944.15,504.16 965.89,525.89 965.89,582.11 961.78,578 v1(961,578)
  Bottom Layer w6: USB1.A7 794.13,578.38 827,578.38 ; USB1.B7 818.27,616.61 827,607.87 827,578.38 ; v1(961,578) 960.11,577.11 828.27,577.11 827,578.38
DOUP: B1.40 BC15.2 | length 79.5
  Top Layer w10: B1.40 728.12,876.14 752.06,852.2 BC15.2
DP_USB+: U10.1 USB1.A6 USB1.B6 | length 351.4
  Top Layer w6: U10.1 924.47,511.12 948.36,535.01 948.36,551.68 946.78,553.25 v1@946,553.25
  Bottom Layer w6: USB1.A6 792.06,596 791.14,596.92 765.05,596.92 754.27,586.14 754.27,567.76 764.47,557.55 USB1.B6 793.43,558 797.43,554 v1(946,554)
GET_VBAT: R20.2 U1.33 U12.6 | length 953.5
  Top Layer w8: v1(440.95,645.5) 441.5,645.5 459.59,663.59 459.59,685.47 U1.33 ; R20.2 821.88,313.11 909.21,313.11 924.52,297.79 924.52,273.12 U12.6
  POWER w8: v1@443.15,643.3 v1(440.95,645.5) 440.95,364.54 v1(450.84,354.65) ; v1(675.6,301) 681.49,306.89 817.78,306.89 v1(823.81,312.92)
  Bottom Layer w8: v1(450.84,354.65) 461.49,344 559.06,344 602.06,301 v1(675.6,301)
GND: AN1.2 B1.1 B1.41 BC1.2 BC2.2 BC3.2 BC4.2 BC5.2 BC8.1 BC9.1 BC11.2 BC12.2 BC13.1 BC14.2 BC15.1 BL4.1 BR1.2 C1.1 C2.1 C3.2 C4.1 C5.1 C6.1 C7.1 C8.2 C9.2 C10.2 C11.2 C12.1 C13.2 C14.2 C15.2 C16.1 C18.2 C19.1 C20.1 C21.1 C22.2 L1.1 L1.5 L1.6 L1.12 P2.2 P3.2 R2.1 R13.2 R15.1 R16.1 R17.1 R19.2 R20.1 R22.2 R23.1 R24.1 SH1.7 U1.8 U1.23 U1.35 U1.47 U1.49 U2.2 U3.4 U5.4 U6.2 U6.7 U7.9 U7.11 U8.1 U8.6 U8.7 U8.9 U8.11 U8.18 U10.3 U11.2 U12.2 U13.2 U14.2 U15.2 USB1.A1B12 USB1.B1A12 X2.2 X2.4 X3.2 X3.4 | length 310
  Top Layer w6: v1(35.62,1006.67) AN1.2 ; v1(410.15,723.3) 410.15,722.96 420.57,712.54 U1.35 ; v1(532.68,369) 532.68,388.59 537.95,393.86 537.95,413.44 U1.8 ; U7.11 944.15,1176.62 947.67,1180.13 947.94,1180.13 954.5,1186.69 978.68,1186.69 986.56,1178.81 v1(990.26,1178.81)
  other v1: 627.15,38 963.84,69.43 1011.96,111.45 532.68,156.81 629.69,165.5 288,185.59 808.18,186.76 92.97,212.11 447.24,221.52 574.74,249 511.83,279.96 728,286 280.01,295.88 187.46,309.5 430.35,311.82 280.33,375.84 132.59,409.78 1002.31,518.77 515.03,540.16 124,587 887.42,605.49 65.01,625.74 686.45,649.5 892.43,681.57 38.62,708 961.14,713.06 153.72,765.94 75.78,772.26 479.38,789.02 372.88,794.53 108.26,822.36 948.86,865.91 141.72,965.1 923.49,987.87 1001.95,988.12 1000.97,1026 698.46,1071.09 812.75,1091.11 350.61,1092.02 675.6,1099.34 349.98,1128.7 864.78,1179.34 670.47,1191.04 535.55,1196.76 828.81,1205.28 299.34,1222.47 804.25,1228.31
HMC_DRDY: U1.40 U7.15 | length 1328.7
  Top Layer w6: v1(196.27,952.24) 200.98,947.53 219,947.53 280.01,886.52 280.01,770.92 260.12,751.03 260.12,733.24 273.44,719.92 273.44,656.43 331.76,598.11 372.23,598.11 U1.40 ; v1(870.96,1006.31) 870.96,1082.6 888.69,1100.33 900.9,1100.33 U7.15
  Bottom Layer w6: v1(196.27,952.24) 196.27,959.4 279.87,1043 725.3,1043 761.99,1006.31 v1(870.96,1006.31)
IIC1_SCL: R10.1 U1.42 U5.6 U8.23 | length 1482.5
  Top Layer w6: U8.23 89.29,893.83 v1(108.98,913.51) ; v1(226.76,901) 266.39,861.37 266.39,778.53 246.76,758.9 246.76,743.16 236.23,732.63 v1(236.23,728.93) 236.82,728.34 236.82,706.46 226.87,696.52 226.87,647.21 314.24,559.84 U1.42
  POWER w8: v1(207,232) 155.8,283.2 155.8,434.94 124,466.73 124,541.23 154.48,571.71 154.48,616.59 143.89,627.18 143.89,684.42 199.53,740.06 225.1,740.06 v1(236.23,728.93)
  Bottom Layer w6: v1(108.98,913.51) 214.25,913.51 v1(226.76,901) ; v1(207,232) 211.23,232 266.23,177 266.23,74.62 260.86,69.25 U5.6
IIC1_SDA: R11.1 U1.43 U5.5 U8.24 | length 1280.7
  Top Layer w6: R11.1 45.39,893.28 40,887.9 v1(40,884.19) 53.45,870.75 U8.24 ; v1(213.89,713.46) 213.89,637.35 311.08,540.16 U1.43
  POWER w8: v1(213.89,713.46) 213.89,711.94 199.2,697.26 199.2,528.34 206.89,520.65 206.89,406.14 246.34,366.69 v1(246.34,168.77)
  Bottom Layer w6: v1(40,884.19) 33.04,877.23 33.04,858.5 178.07,713.46 v1(213.89,713.46) ; U5.5 244.86,88.95 246.76,90.85 246.76,156.81
  Bottom Layer w8: v1(246.34,168.77) 246.76,168.34 246.76,156.81
IIC2_SCL: R4.1 U1.21 U6.6 U7.1 | length 783
  Top Layer w6: U1.21 703.94,599.21 730.22,625.49 730.22,734.6 818.38,822.76 R4.1 856.11,822.76 v1(866.53,833.18) 866.53,836.96 882.8,853.24 U6.6 ; U7.1 924.52,1091.59 934.55,1101.61 v1(934.55,1105.32)
  POWER w10: v1(866.53,833.18) 961.05,927.7 961.05,1078.82 v1(934.55,1105.32)
IIC2_SDA: R6.1 U1.22 U6.1 U7.16 | length 865.7
  Top Layer w6: U1.22 690.9,618.9 717.6,645.6 717.6,744.4 805.25,832.05 805.25,866.02 817.23,878 v1(838,878) 838,904.07 R6.1 ; v1(893.28,977) 893.28,1026 903.34,1036.06 903.34,1083.08 U7.16 ; v1(955,813.47) 991.07,813.47 1003.94,826.34 U6.1
  POWER w10: v1(838,878) 893.16,933.16 893.16,976.88 v1(893.28,977)
  Bottom Layer w6: v1(838,878) 890.47,878 v1(955,813.47)
key-2: U1.32 U2.4 | length 820
  Top Layer w8: v1(474,647) 479.63,652.63 U1.32
  POWER w8: v1(469,249) 471.73,251.73 471.73,383.94 459.59,396.08 459.59,631.11 474.74,646.26 v1(474,647) ; v1(525,244) 507.55,226.55 507.55,112.29 v1(594.24,25.6)
  Bottom Layer w8: v1(469,249) 474,244 v1(525,244) ; U2.4 562.61,35.43 569.44,28.6 591.24,28.6 v1(594.24,25.6)
KEY_1_WKUP: U1.10 U4.3 | length 492.9
  Top Layer w6: v1(381.04,165.5) 462.37,165.5 484.25,187.39 v1(557.7,187.39) ; U1.10 578.06,370.82 615,333.87 613,331.87 v1(613,323)
  POWER w8: v1@557.58,187.5 557.58,191.5 613,246.92 v1(613,323)
  Bottom Layer w6: v1@558.29,186.76 559.74,188.21 v1@558.29,188.21
  Bottom Layer w9: U4.3 383.17,162.94 v1@385.73,165.5
LCD_DC: L1.7 U1.45 | length 523.3
  Top Layer w8: v1(322.68,497.83) 325.84,497.83 328.8,500.79 U1.45
  POWER w8: v1(322.68,497.83) 288,532.51 288,670.83 317.11,699.94 317.11,744.29 v1(346.38,773.56)
  Bottom Layer w8: v1(346.38,773.56) 393.45,773.56 440.95,821.06 L1.7@440.95,863.95
LCD_RES: L1.11 U1.46 | length 786.6
  Top Layer w8: v1(303,474.77) 329.78,474.77 336.12,481.1 U1.46
  POWER w8: v1(303,474.77) 267.65,510.11 267.65,692.86 301.79,727 301.79,769.56 365.9,833.67 527.33,833.67 v1(568,793)
  Bottom Layer w6: L1.11@549.59,865.82 549.59,812.69 568,794.28 v1(568,793)
MPU_INT: R14.1 U1.41 U8.12 | length 332.3
  Top Layer w6: R14.1@141.72,653.06 R14.1 138.17,652.68 166.89,652.68 168.03,653.82 U8.12 ; v1(246.76,655.44) 322.68,579.53 U1.41
  Bottom Layer w6: v1(168.03,652.3) 243.62,652.3 v1(246.76,655.44)
NetAN1_1: AN1.1 BL2.1 | length 45.6
  Top Layer w19.68: AN1.1@216.09,1182.92 AN1.1@216.09,1187.53 ; AN1.1@221.01,1168.16 225.93,1163.24 BL2.1@259.97,1163.24
NetBC6_1: BC6.1 BC7.1 BL4.2 | length 59.1
  Top Layer w15.75: BC7.1 379.92,1055.63 BC6.1
NetBC7_2: BC7.2 BL3.2 BL5.1 | length 73.3
  Top Layer w15.75: BL3.2 317.67,1040.93 319.7,1042.97 322.49,1040.18 338.36,1040.18 ; BL5.1 349.18,1018.66 338.36,1029.48 338.36,1040.18 ; BC7.2 349.44,1051.26 338.36,1040.18
NetBC8_2: BC8.2 BL2.2 BL3.1 | length 89.4
  Top Layer w15: BL2.2@281.52,1141.69 278.73,1138.91 278.73,1138.38 284.1,1133.01 BC8.2 284.47,1097.74 284.47,1076.51 297.05,1063.94 297.05,1063.41 BL3.1
NetBC9_2: BC9.2 BC10.1 BL5.2 | length 60.6
  Top Layer w15.75: BL5.2 379.65,1013 BC10.1
NetC8_1: C8.1 pad.2@488,49.15 U2.6 | length 162.4
  Top Layer w10: v1(459.59,32.43) 482.17,32.43 488,38.25 488,49.15 C8.1
  Bottom Layer w10: v1(459.59,32.43) 481.98,32.43 487.81,38.25 U2.6
NetC10_1: C10.1 pad.2@553.81,48.22 U2.5 | length 127.8
  Top Layer w8: v1@525,25.6 546.98,25.6 553.81,32.43 553.81,48.22 553.18,48.86 553.18,127.47 C10.1
  other v1: 524.14,24.59
NetC14_1: C14.1 U8.20 | length 51.2
  Top Layer w8: C14.1 148.17,921.59 148.17,870.92 U8.20
NetC15_1: C15.1 U7.10 | length 157.1
  Top Layer w10: C15.1 v1(918.22,1214) ; U7.10 964.74,1162.29 964.74,1147.04 976.16,1135.62 v1(976.16,1133)
  Bottom Layer w10: v1(918.22,1214) 918.22,1200.9 976.16,1142.95 v1(976.16,1133)
NetC16_2: C16.2 U8.10 | length 89.8
  Top Layer w6: C16.2 83.66,653.19 100.52,653.19 125.75,678.42 125.75,710.36 U8.10
NetC17_1: C17.1 U7.8 | length 87.8
  Top Layer w8: C17.1 1016.19,1187.05 1016.19,1154.06 1004.73,1142.61 U7.8
NetC17_2: C17.2 U7.12 | length 77.7
  Top Layer w6: U7.12 924.52,1184.63 C17.2@953.89,1214 ; C17.2@953.89,1214 954.83,1213.06 954.83,1210.06 C17.2 C17.2@953.89,1214
NetC18_1: C18.1 U10.10 | length 56.8
  Top Layer w10: C18.1 918.22,666.68 924.47,660.42 U10.10
NetP0_1: P0.1 U5.3 | length 76.4
  Bottom Layer w8: P0.1 86.32,74 91.07,69.25 U5.3
NetP0_2: P0.2 U5.2 | length 76.7
  Bottom Layer w8: P0.2 53.65,48.65 122.54,48.65 U5.2
NetP2_1: P2.1 U9.2 | length 333.5
  Top Layer w10: v1(805.01,1168) 826.12,1168 850.01,1144.12 U9.2
  POWER w10: v1@788,902 788,1149.88 805.01,1166.88 v1(805.01,1168)
  other v1: 788,901
NetR8_1: R8.1 U5.1 | length 132.4
  Top Layer w8: v1@89.29,121.51 97,113.8 v1(97,22)
  Bottom Layer w8: v1(97,22) 104.64,22 112.49,29.85 U5.1
  other v1: 93.15,117.66
NetR12_2: R12.2 R13.1 U9.1 | length 113.8
  Top Layer w8: R13.1 841.09,1059.94 855.6,1074.44 U9.1
  Top Layer w10: R13.1 841.17,1055.93 841.17,997.07 R12.2
NetR15_2: R15.2 USB1.A5 | length 49.4
  Top Layer w6: v1(835.24,636.29) 846.78,636.29 847.07,636 849.65,638.58 R15.2
  Bottom Layer w6: USB1.A5 v1@826.71,636.29
NetR16_2: R16.2 USB1.B5 | length 69.2
  Top Layer w6: v1(836.25,530.47) 841.23,530.47 848.69,523 R16.2
  Bottom Layer w6: USB1.B5@791.59,518.95 825.6,518.95 836.25,529.6 v1(836.25,530.47)
NetR17_2: R17.2 U11.5 | length 59.3
  Top Layer w8: R17.2 839.4,275 853.73,289.33 U11.5
NetR18_2: R18.2 U12.1 | length 61.3
  Top Layer w18: R18.2 813.27,219.82 824.45,231 U12.1
NetT1_1: T1.1 U1.20 | length 124.5
  Top Layer w8: U1.20 707.78,579.53 T1.1
NetU2_3: U2.3 U4.1 | length 222.5
  Bottom Layer w8: U4.1@413.45,29.85 479.86,96.26 554.86,96.26 562.61,104.02 U2.3
NRST: R1.1 U1.7 | length 119.4
  Top Layer w6: U1.7 519,389.07 510.85,380.92 510.85,354.25 531.29,333.81 547.67,333.81 552.54,328.94 R1.1
P00: B1.19
P01: B1.18
P04: B1.15
P05: B1.14
P06: B1.13
P07: B1.12
P11: B1.9
P12: B1.8
P13: B1.7
P14: B1.6
P15: B1.5
P16: B1.38
P17: B1.37
P20: B1.36
P23: B1.33 BC11.1 X4.2 | length 145.3
  Top Layer w6: B1.33 587.71,915.18 587.71,872.07 608,851.78 X4.2@608,842.46 ; X4.2 X4.2@608,842.46 ; BC11.1 618.78,853.24 X4.2@608,842.46
P24: B1.32 BC14.1 X4.1 | length 142
  Top Layer w8: X4.1@548.94,844.28 548.94,851.78 570.64,873.47 B1.32
  Top Layer w10: BC14.1 540.17,853.06 548.94,844.28 X4.1
PC14: C1.2 U1.3 X1.2 | length 267.2
  Top Layer w6: C1.2 319.13,234.47 324,239.35 X1.2 324,342.14 334.08,352.22 394.15,352.22 440.26,398.33 U1.3
PC15: C2.2 U1.4 X1.1 | length 215
  Top Layer w6: C2.2 378.18,234.24 383.06,239.11 X1.1 383.06,314.99 459.94,391.88 U1.4
PH0: C3.1 U1.5 X2.1 | length 223.4
  Top Layer w6: C3.1 416.76,249.54 442.23,275 X2.1 450.24,275 472.3,297.06 472.3,330.59 479.63,337.92 U1.5
PH1: C4.2 U1.6 X2.3 | length 168.4
  Top Layer w6: U1.6 499.11,413.97 499.11,318.51 X2.3 508.13,309.5 515.49,309.5 516.75,308.24 549.87,275.12 C4.2
RBLAS: B1.30 BR1.1 | length 125.2
  Top Layer w8: BR1.1 408.24,918.06 412.11,921.94 436.22,921.94 454.51,940.23 483.45,940.23 490.49,947.26 B1.30
RESET: B1.20 SH1.3 | length 1202.2
  Top Layer w8: B1.20@551.53,1154.47 B1.20 550.95,1178.88 v1(567.78,1195.7)
  POWER w8: v1(567.78,1195.7) 567.78,824.04 633.86,757.96 633.86,617.36 684,567.22 v1(684,346)
  Bottom Layer w8: v1(684,346) 710.65,346 822.47,234.18 SH1.3
RF_N: B1.26 BC10.2 | length 53.2
  Top Layer w10: BC10.2@475.71,1013 475.71,1016.94 484.77,1026 B1.26
RF_P: B1.25 BC6.2 | length 52.1
  Top Layer w10: BC6.2@475.71,1056 475.71,1052.06 482.09,1045.68 B1.25
RXD: U1.31 U10.8 | length 679.6
  Top Layer w6: v1@487.27,723.3 v1(487.27,721.87) 499.12,710.02 499.12,686.02 U1.31 ; v1(752.06,674.76) 752.37,675.06 845.99,675.06 861.1,690.17 861.1,719.66 878.46,737.01 916.66,737.01 939.5,714.17 939.5,685.47 945.61,679.37 959.28,679.37 963.84,674.81 U10.8
  Bottom Layer w6: v1@487.27,723.3 504.81,740.84 531.72,740.84 558.29,714.26 628.04,714.26 642.71,728.93 697.89,728.93 v1(752.06,674.76)
SPI1_CS_FLASH: U1.14 U3.1 | length 579.3
  Top Layer w6: U1.14 677.04,461.42 687.96,450.5 687.96,426.66 678.3,417 661.37,417 v1(661.22,416.85)
  Top Layer w8: U3.1@212.79,472.52 212.79,468.29 219.66,461.42 219.66,463.65 244.53,463.65 v1(246.76,461.42)
  Bottom Layer w6: v1(246.76,461.42) 291.33,416.85 v1(661.22,416.85)
SPI1_CS_LCD: L1.8 U1.11 | length 649.9
  Top Layer w8: U1.11 597.74,390.79 615,373.53 v1(615,369)
  POWER w8: v1(447.91,795.01) 447.91,780.8 466.38,762.33 466.38,700.08 544.83,621.63 544.83,398.78 574.61,369 v1(615,369)
  Bottom Layer w8: v1(447.91,795.01) 466.99,814.09 L1.8@466.99,865.84
SPI1_MISO: R3.1 U1.16 U3.2 | length 617.4
  Top Layer w6: R3.1 v1(148,512) 148,497.83 162.79,483.04 U3.2 U3.2@162.79,472.52 ; v1(612.1,493.02) 615.8,493.02 622.83,500.05 644.25,500.05 U1.16
  Bottom Layer w6: v1(148,512) 196.05,560.05 531.98,560.05 599,493.02 v1(612.1,493.02)
SPI1_MOSI: L1.10 R5.1 U1.17 U3.5 | length 1512
  Top Layer w6: v1(611,520) 644.51,520 U1.17
  Top Layer w8: R5.1 43.95,535.9 40.08,532.02 40.08,188.21 62.79,165.5 U3.5 U3.5@62.79,154.98
  POWER w8: v1(539.92,788.65) 539.92,759.09 602.89,696.11 602.89,594.11 631.89,565.11 631.89,532.36 619.53,520 v1(611,520)
  Bottom Layer w6: v1(43,527) 43,534.13 115.76,606.89 132.24,606.89 162.02,577.11 544.24,577.11
  Bottom Layer w8: L1.10 522.03,807.78 539.92,789.89 v1(539.92,788.65) ; 544.24,577.11 601.35,520 v1(611,520)
SPI1_SCK: L1.9 R9.1 U1.15 U3.6 | length 1472.5
  Top Layer w6: U3.6@112.79,154.98 U3.6 112.79,189.99 132.27,209.47 212.6,209.47 246.52,243.39 246.52,382.4 187.46,441.46 187.46,531.02 192.34,535.9 R9.1 ; v1(578.06,452.01) 603.09,452.01 632.19,481.1 U1.15
  POWER w8: v1(508.84,791.42) 508.84,766.05 561.11,713.78 561.11,636.89 566.89,631.11 566.89,466.95 566.89,463.17 v1(578.06,452.01)
  Bottom Layer w6: v1(186,512) 203.6,529.6 461.33,529.6 538.92,452.01 v1(578.06,452.01) ; L1.9@494.93,865.84 494.93,805.34 v1(508.84,791.42)
ST25DV_GPO: R7.2 U1.28 U5.7 | length 1588.6
  Top Layer w6: U1.28 558.37,722.96 569.56,734.15 v1(597.67,734.15)
  POWER w8: v1(126.49,116.07) 270.07,116.07 v1(299.86,145.86) 322.68,168.68 322.68,206.32 v1(274,255) ; v1(597.67,734.15) 599.14,734.15 619.53,713.75 619.53,604.36 651.54,572.35 651.54,457.83 633.86,440.15 633.86,405.46 663.11,376.21 663.11,347.89 650,334.78 v1(650,323)
  Bottom Layer w6: U5.7 263.9,49.55 282.11,67.76 282.11,128.11 v1(299.86,145.86)
  Bottom Layer w8: R7.2@124,126 126.49,123.51 R7.2 ; v1(274,255) 238.54,290.46 238.54,363.59 271.68,396.73 278.06,396.73 279.87,398.54 532.68,398.54 583.11,348.11 617.43,348.11 630.43,335.11 634.73,335.11 646.84,323 v1(650,323)
SWCLK: SH1.4 U1.37 | length 1621.8
  Top Layer w6: U1.37 367.18,664.42 367.18,725.42 409.69,767.93 v1(431.24,767.93)
  POWER w10: v1(799.79,129) 799.79,115.69 811.47,104.02 828.13,104.02 934.59,210.48 934.59,511.63 982.89,559.93 982.89,660.35 918.22,725.03 v1(918.22,770.83)
  Bottom Layer w6: v1(431.24,767.93) 715.96,767.93 760.75,812.73 903,812.73 918.22,797.51 v1(918.22,770.83)
  Bottom Layer w8: v1(799.79,129) 799.79,142.34 852.27,194.81 SH1.4
SWDIO: SH1.5 U1.34 | length 1293.5
  Top Layer w6: U1.34 v1(440.26,724.26)
  POWER w10: v1(827,140) 903.16,216.16 903.16,545.74 918.22,560.8 918.22,694.44 894.76,717.9 v1(894.76,792.84)
  Bottom Layer w6: v1(440.26,724.26) 473.16,757.16 728.8,757.16 764.47,792.84 v1(894.76,792.84)
  Bottom Layer w8: v1(827,140) 828.03,140 843.47,155.44 SH1.5
SYS_ON: R24.2 U1.26 U15.6 | length 884.7
  Top Layer w8: U15.6 374.55,104.2 385.57,93.17 R24.2 ; v1(500.59,635.79) 501.82,634.55 568.02,634.55 569.4,633.17 573.28,633.17 573.35,633.11 590.65,633.11 602.89,645.35 602.89,662.65 597.74,667.8 U1.26
  POWER w8: v1(330.34,104.02) 368.42,142.09 445.38,142.09 489.89,186.6 489.89,625.08 v1(500.59,635.79)
SYS_WKUP2: B1.11 U1.2 | length 1582.9
  Top Layer w6: v1(365.75,1230.56) 368,1232.81 681.6,1232.81 699.96,1214.45 699.96,1195.7
  Top Layer w8: v1(246.76,412.91) 259.44,400.24 259.44,367.18 271.68,354.95 288.98,354.95 306.15,372.11 391.31,372.11 420.57,401.38 U1.2 ; 699.96,1195.7 712.09,1183.57 722.69,1183.57 728.12,1178.15 B1.11
  POWER w10: v1(246.76,412.91) 274,440.15 274,467.83 219.89,521.94 219.89,526.04 219,526.93 219,673.09 258.12,712.21 258.12,733.73 258.12,755.16 328.09,825.13 328.09,1192.9 v1(365.75,1230.56)
TIM1_CH1: L1.2 U1.29 | length 431.1
  Top Layer w6: v1@280.33,742.79 303,765.46 v1(303,833.18) ; U1.29 538.68,657.32 v1(540,656)
  Bottom Layer w6: v1(280.01,742.79) 283.71,742.79 292.55,733.95 292.55,725.9 318.11,700.34 318.11,699.76 329.76,688.11 330.34,688.11 350.55,667.9 520.78,667.9 532.69,656 v1(540,656)
TIM2_CH1: R12.1 U1.38 | length 1051.8
  Top Layer w6: v1(237,972) 322.89,886.11 322.89,745.13 311,733.24 311,676.92 349.33,638.58 U1.38 ; v1(810.62,977) 810.76,977.14 R12.1
  Bottom Layer w6: v1(237,972) 245.89,972 301.89,1028 639.14,1028 690.14,977 v1(810.62,977)
TXD: U1.30 U10.9 | length 563.4
  Top Layer w6: v1@515.03,723.3 519.74,718.59 519.74,686.56 U1.30 ; v1(750.11,645.5) 751.19,645.5 763.08,657.39 891.01,657.39 902.9,645.5 902.9,632.72 915.67,619.96 944.15,619.96 U10.9
  Bottom Layer w6: v1@515.03,723.3 522,723.3 545.54,699.76 631.9,699.76 641.23,709.1 674.21,709.1 677.81,705.5 ; v1@745.12,645.5 v1(750.11,645.5)
  Bottom Layer w8: 677.81,705.5 737.81,645.5 v1@745.12,645.5
  other v1: 517.38,720.95
USART2_RX: B1.16 U1.13 | length 1045.7
  Top Layer w6: U1.13 639.23,435.98 639.23,407.11 649.38,396.96 755.75,396.96 v1(757.33,398.54)
  Top Layer w8: B1.16 630.27,1154.47 630.27,1191.04 v1(631.9,1192.66)
  POWER w8: v1(631.9,1192.66) 631.9,868.36 728,772.26 728,606.46 757.33,577.13 v1(757.33,398.54)
USART2_TX: B1.17 U1.12 | length 1052.4
  Top Layer w6: U1.12 617.43,400.63 642.17,375.89 702.8,375.89 v1(707.39,371.3)
  Top Layer w8: v1(600.17,1193.67) 600.17,1190.51 609.43,1181.24 609.43,1154.47 B1.17
  POWER w8: v1(600.17,1193.67) 600.17,924.57 585.2,909.6 585.2,838.63 675.64,748.19 675.64,668.23 659.14,651.73 659.14,620.2 707.39,571.95 v1(707.39,371.3)
usb_in_sign: R21.2 R22.1 U1.39 | length 615.4
  Top Layer w6: v1@341.47,617.51 342.41,618.45 372.88,618.45 U1.39 ; v1(752,612) 837.12,612 R22.1 849.9,595.28 875.5,569.68 875.5,564.72 R21.2
  Bottom Layer w6: v1(340,618) 362,596 736,596 v1(752,612)
USB_M/SDA: B1.3
USB_P/SCL: B1.2
V_EH: R8.2 U1.27 | length 1091.6
  Top Layer w8: U1.27 582,681.88 v1(582,654)
  POWER w6: v1(28.95,149.64) 65.01,185.7 v1(65.01,592.94)
  Bottom Layer w6: v1@33.92,143.29 42.4,134.81 55.67,134.81 60.55,129.94 R8.2 ; v1(65.01,592.94) 97.82,625.74 292.45,625.74 304.6,637.89 363.65,637.89 389.54,612 532.69,612 540.82,620.14 541.04,620.14 574.96,654.06 575.03,654 v1(582,654)
VBAT: C21.2 P3.1 U11.3 U12.4 U12.5 U13.1 U13.3 | length 846.8
  Top Layer w23.62: U13.3 630.68,129.09 663.26,129.09 677.24,143.06 677.24,189.07 663.4,202.91 U13.1 ; U11.3 1002.35,364.14 1016.19,350.3 1016.19,207.44 1002.35,193.6 v1(984.5,193.6) U12.5 U12.4
  POWER w23.62: v1(690.14,89.24) 723.37,56 903.16,56 1002.45,155.29 1002.45,169.94 v1(1016.19,156.2)
  other v1: 659.14,89.24 615,126 651.54,126 989.7,154.98 1016.19,193.6
VCC1: B1.4 B1.10 B1.21 B1.24 B1.27 B1.28 B1.29 B1.31 B1.39 BC1.1 BC2.1 BC3.1 BC4.1 BC5.1 BL1.1 | length 1408.7
  Top Layer w10: BC3.1 409.11,825.87 409.11,844.28 418.06,853.24 ; BC5.1 406.24,865.06 418.06,853.24 ; BC2.1 476.54,1113.51 493.08,1113.51 498.27,1118.7 498.27,1120.07 506.81,1128.61 v1(506.81,1131.23) ; B1.27 B1.28 ; B1.24 v1(544.83,1065.37) 555,1055.2 555,997 544.63,986.63 B1.28 ; BC4.1 B1.39 708.43,944.77 726.86,963.2 726.86,1000.14 v1(732.84,1006.12) ; B1.10 v1(757.33,1169.21) BC1.1 ; 418.06,853.24 BL1.1 445.24,894.85 468.18,917.8 B1.31 550.95,958.31 542.52,966.75 521.43,966.75 B1.29 B1.28
  POWER w19.68: v1(544.83,1065.37) 531.42,1065.37 502.96,1093.83 502.96,1206.96 521.2,1225.2 701.34,1225.2 v1(757.33,1169.21) 757.33,1030.61 v1(732.84,1006.12)
VDD-BLE: BL1.2 U14.1 | length 1267.2
  Top Layer w10: v1(351,744.85) 365.68,744.85 428.92,808.08 430.03,808.08 438.84,816.9 439.37,816.9 BL1.2
  Top Layer w15: v1(414.82,189.62) 418.8,193.6 463,193.6 485.54,216.14 582.1,216.14 588.11,210.13 588.11,114.86 654.75,48.22 699.53,48.22 751.71,100.4 U14.1@807.24,100.4 ; U14.1 798.68,99.39 U14.1@799.5,100.22
  POWER w15: v1(351,744.85) 364.39,731.46 364.39,240.06 v1(414.82,189.62)
VDD-MCU: C5.2 C6.2 C7.2 C22.1 R1.2 SH1.6 U1.1 U1.9 U1.24 U1.36 U1.48 U2.1 U4.2 U13.5 U14.4 U14.5 U15.4 U15.5 | length 2241.2
  Top Layer w8: U1.36 400.89,699.12 389.22,710.79 389.22,731.91 402.46,745.15 553.18,745.15 563.07,755.04 616.54,755.04 657.52,714.06 668.67,714.06 687.96,694.78 C5.2 ; 413.27,452.01 545.95,452.01 558.37,439.58 U1.9
  Top Layer w10: U15.5 U15.4 346.38,29.39 ; C6.2 332.24,416.85 357.05,441.65 U1.48 U1.48 403,441.73 ; 347.06,34.2 C7.2 ; U1.1 400.89,439.62 403,441.73 ; U1.36 400.97,685.75 400.97,661.8 413.27,649.5 413.27,452.01 403,441.73 ; U1.9 558.37,364.49 580.72,342.14 580.72,327.29 R1.2 583.01,321.06 614.74,289.33 649.84,289.33 677.24,261.94 C22.1 677.24,254.06 709.5,221.8 709.5,208.73 U13.5@715.32,202.91 ; U1.24@644.91,658.19 U1.24 657.62,658.27 657.7,658.35 657.7,659.68 658.82,659.68 687.96,688.81 C5.2@687.96,690.04
  Top Layer w20: U14.4 U14.5
  Bottom Layer w8: v1(303,69.2) v1@303,69.43 ; U4.2 345.57,57.02 357.32,68.77 374.71,68.77 396.79,90.85 420.57,90.85 456.75,127.03 480.98,127.03 487.81,133.85 U2.1
  Bottom Layer w20: U2.1 488.64,147.48 488.64,176.86 526.88,215.1 692.8,215.1 v1(739.14,168.77) 739.14,141.59 786.42,94.31 826.09,94.31 832.85,101.07 ; v1(849.85,25.6) 832.85,42.6 832.85,101.07 ; SH1.6 880.15,116.07 878.34,117.88 849.66,117.88 832.85,101.07
  other v1: 301.32,25.6 902.9,25.6 717.6,193.6
XOC_1: B1.22 BC13.2 X3.3 | length 201.9
  Top Layer w8: X3.3 BC13.2 509.16,1166.34 548.94,1126.55 548.94,1109.43 544.83,1105.32 521.81,1105.32 B1.22
XOC_2: B1.23 BC12.1 X3.1 | length 225.7
  Top Layer w8: BC12.1@350.61,1168 400.19,1168 X3.1 404.85,1170.69 413.66,1161.88 413.66,1159.91 440.51,1133.07 440.51,1103.51 458.96,1085.06 B1.23
pads on no net: M1.3 SH1.8 SH1.9 U1.19 U5.9 U6.3 U6.4 U7.3 U7.5 U7.6 U7.7 U7.14 U8.2 U8.3 U8.4 U8.5 U8.14 U8.15 U8.16 U8.17 U8.19 U8.21 U8.22 U10.4 U10.5 U10.6 U11.1 U12.3 U13.4 U14.3 U15.3 USB1. USB1.1 USB1.2 USB1.3 USB1.4 USB1.A8 USB1.B8

## Polygon pours and split planes (outlines as drawn)
GND on GND "Top Layer-No Net1" (solid, pour order 6): 0,0 0,1259.84 1043.31,1259.84 1043.31,0
GND on Bottom Layer "Top Layer-No Net3" (solid, pour order 8): 0,0 0,1259.84 1043.31,1259.84 1043.31,0
GND on POWER "Top Layer-No Net2" (solid, pour order 7): 0,0 0,1259.84 1043.31,1259.84 1043.31,0
GND on Top Layer "Top Layer-No Net" (solid, pour order 5): 0,0 0,1259.84 1043.31,1259.84 1043.31,0

## Keep-outs
Keep-Out Layer:
  the board outline again, w10

## Other copper
Top Layer:
  rectangle net VBAT: 966.64,145 1029,193.6
  rectangle net VDD-MCU: 849.85,25.6 902.9,71.6
  rectangle net VDD-MCU: 707.78,153 751.44,211.4
  rectangle net VDD-MCU: 286.03,17 346.38,74
  pour cut-out: 274,1259.16 273.53,1258.69 273.53,1007.16 0,1007.16 0,1259
GND:
  pour cut-out: 274,1260 273.53,1259.53 273.53,1008 0,1008 0,1259.84
POWER:
  rectangle net VBAT: 966.64,145 1029,203
  rectangle net VBAT: 593.81,74 698.52,135
  pour cut-out: 274,1260 273.53,1259.53 273.53,1008 0,1008 0,1259.84
Bottom Layer:
  rectangle net VDD-MCU: 831.78,17 915.67,40
  region net VDD-MCU: 900.9,17 900.9,44.69 834.9,44.69 834.9,17
  rectangle net VBAT: 594.24,89.24 667.53,112.54
  region net VDD-MCU: 345.57,17.76 345.57,75.76 301.32,75.76 301.32,17.76
  pour cut-out: 274,1260 273.53,1259.53 273.53,1008 0,1008 0,1259.84

## Silkscreen, mask and mechanical layers (free items; w line width, h text height)
Top Overlay:
  lines w10: 5.45,100.52 1032.47,100.52
Bottom Overlay:
  text "H-watch V2.4" at 533.24,1133 h39.37
  text "Jovan.situ" at 440.95,1066.19 h39.37
  text "DD" at 821,311 h60
  text "H-watch V2.4" at 487,308 h60
  text "DC" at 821,268 h60
  text "司徒军华 22.1.24" at 452,238 h60
  text "RS" at 821,225 h60
  text "SC" at 819,176 h60
  text "SD" at 821,131.65 h60
  text "VDD" at 849,82.72 h60
  text "GND" at 849,33 h60